# Altium PCB Oled.PcbDoc
Units mm, origin at the board's own origin, x right, y up, seen from the top; angles counter-clockwise.
Board outline 90 x 40 mm, 2 copper layers (Top Layer, Bottom Layer); 54 components, 35 nets, 150 pads, 111 vias.
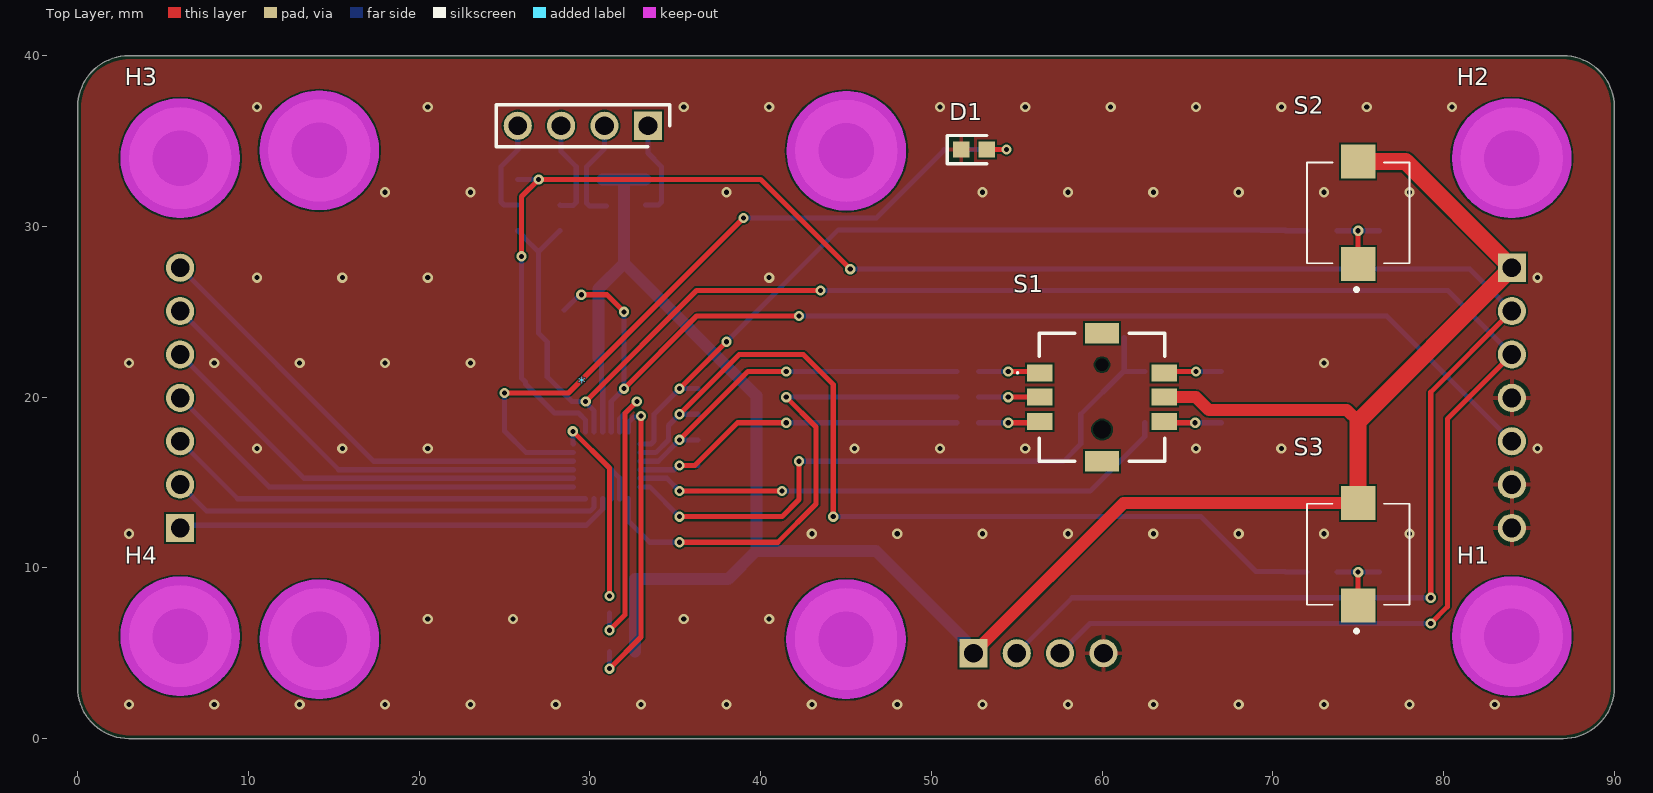
[diagram p0: Top Layer view]
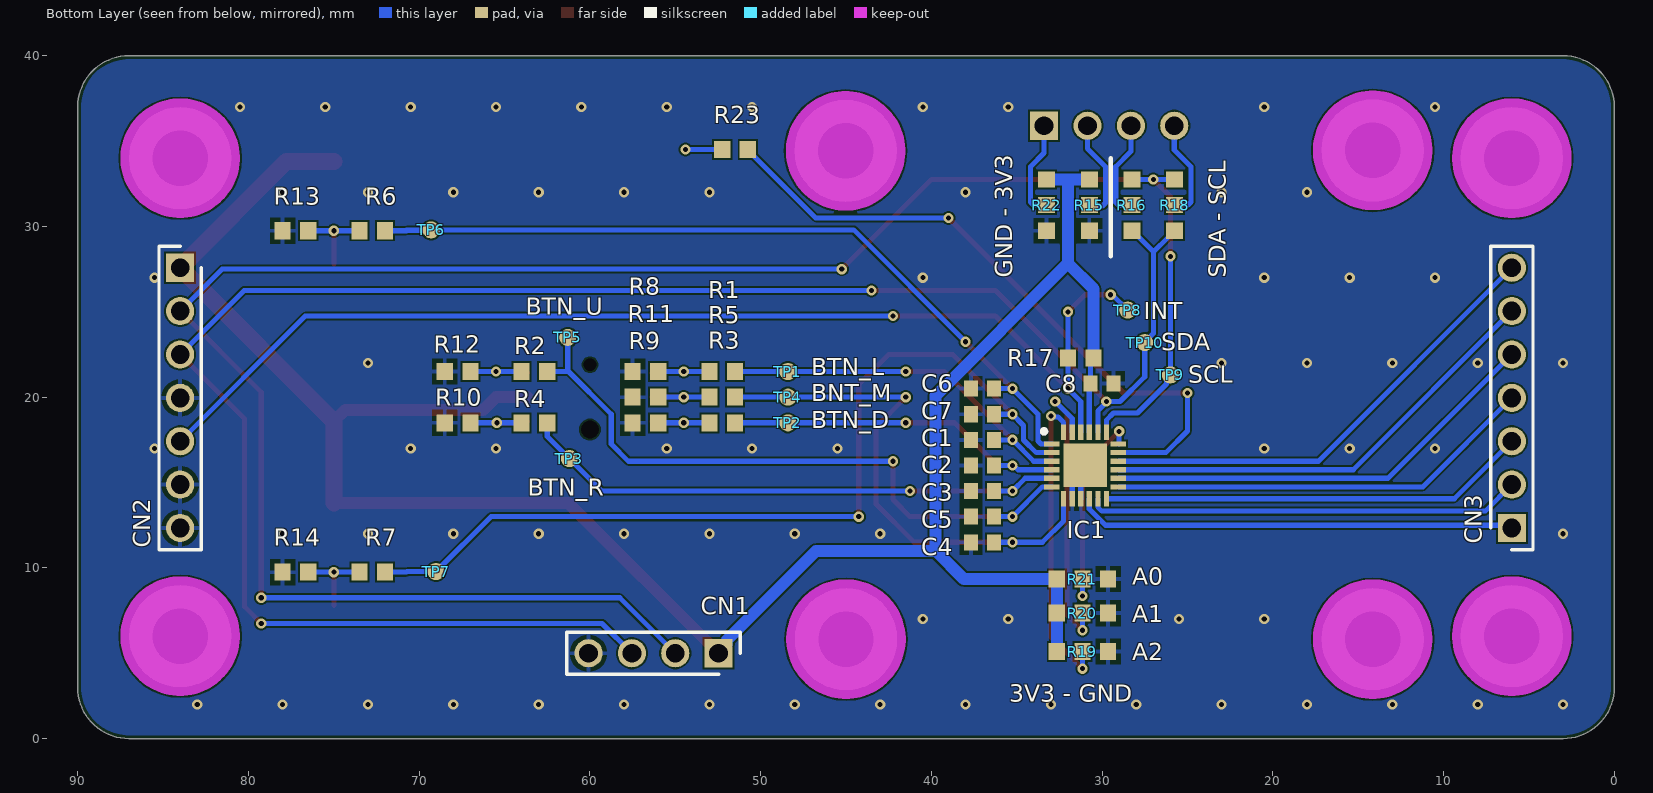
[diagram p1: Bottom Layer view, seen from below]
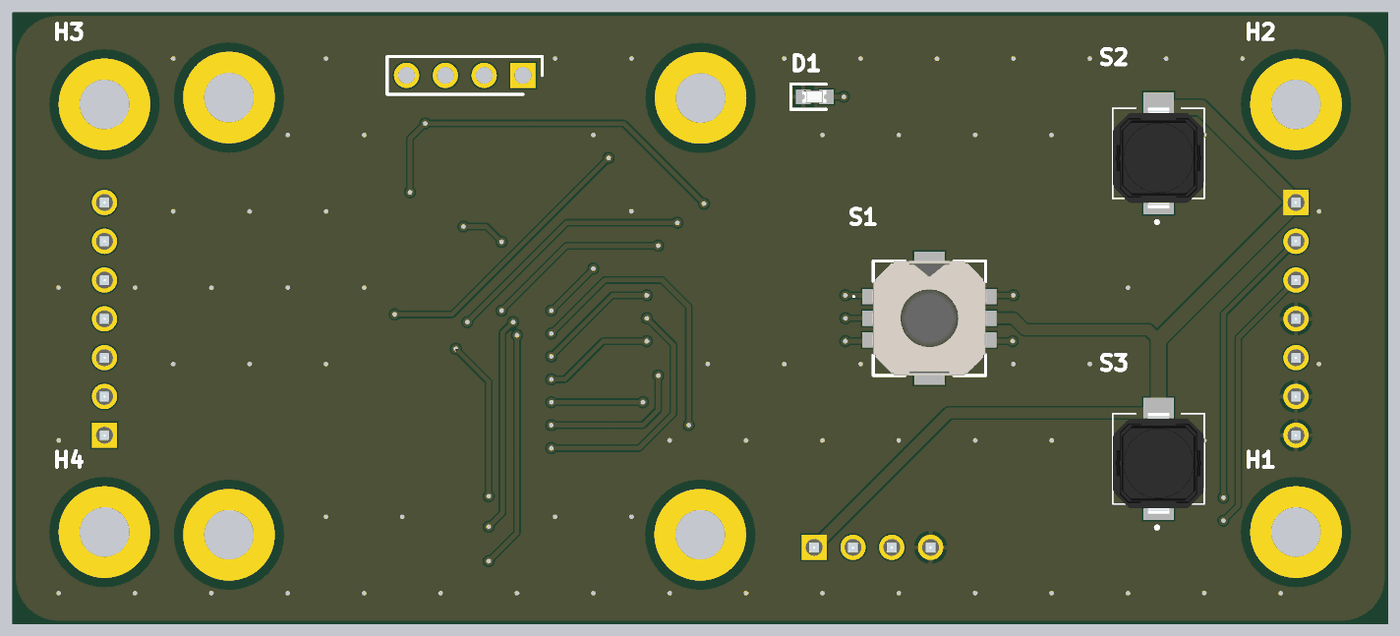
[diagram p2: 3D render of the assembled board from above, using the file's embedded part models]
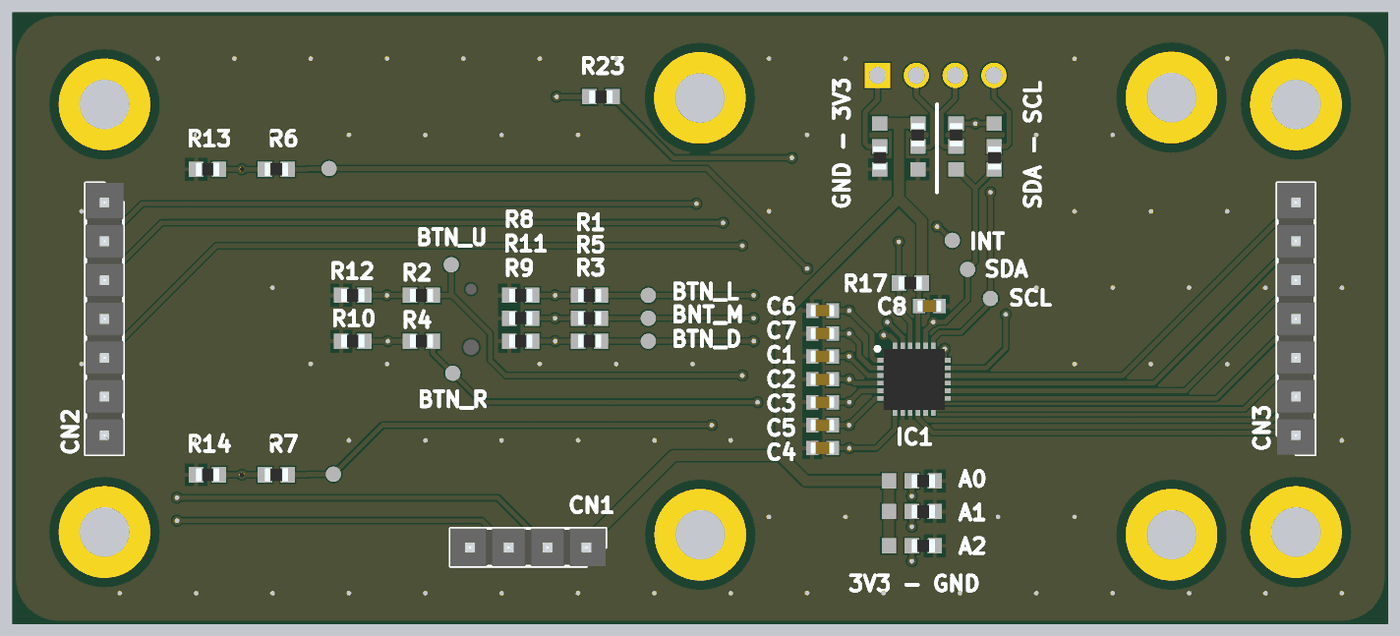
[diagram p3: 3D render of the assembled board from below, using the file's embedded part models]

## Layer stack, top to bottom
Top Solder: solder mask 0.0102, Solder Resist, Dk 3.5
Top Layer: signal copper 0.0356
Dielectric 1: dielectric 0.32, FR-4, Dk 4.8
Bottom Layer: signal copper 0.0356
Bottom Solder: solder mask 0.0102, Solder Resist, Dk 3.5

## Board outline
3,0 cw(c3,3) 0,3 0,37 cw(c3,37) 3,40 87,40 cw(c87,37) 90,37 90,3 cw(c87,3) 87,0

## Design rules (kind name [scope] priority, off if disabled: settings)
AcuteAngle [All] p1: minimum=4.50000000000000E+0001 checktracksonly=FALSE
BoardOutlineClearance [All] p1: gap=0.2 ignorepadtopadclearanceinfootprint=FALSE except(0: Arc-SplitContinuation Track-SplitContinuation SMDPad-SplitContinuation THPad-SplitContinuation Via-SplitContinuation Fill-SplitContinuation Poly-SplitContinuation Region-SplitContinuation Text-SplitContinuation)
Clearance [All] p1: gap=0.1 ignorepadtopadclearanceinfootprint=TRUE except(0: SMDPad-Hole THPad-Hole Via-Hole Text-Hole; 0.127: Arc-Arc Arc-Track Arc-SMDPad Track-Track Track-SMDPad SMDPad-SMDPad SMDPad-Via; 0.15: Arc-Via Track-Via THPad-Via; 0.2: Arc-THPad Arc-Hole Track-THPad Track-Hole SMDPad-THPad; 0.254: Via-Via)
ComponentClearance [All] p1: gap=0 collisioncheckmode=3 verticalgap=0 showdistances=FALSE
DiffPairsRouting 0,1 [All] p1: maxlimit=0.127 minlimit=0.127 mostfreqgap=0.127 toplayer_minwidth=0.123 toplayer_maxwidth=0.123 toplayer_prefwidth=0.123 bottomlayer_minwidth=0.123 bottomlayer_maxwidth=0.123 bottomlayer_prefwidth=0.123 maxuncoupledlength=12.7
HoleSize [All] p1: absolutevalues=TRUE maxlimit=6.3 minlimit=0.3 maxpercent=80.000 minpercent=20.000
HoleToHoleClearance [All] p1: gap=0.5 allowstackedmicrovias=TRUE
MinimumAnnularRing [All] p1: minimumring=0.05
MinimumSolderMaskSliver [All] p1: minsoldermaskwidth=0.1
PlaneConnect [All] p1: planeconnectstyle=Direct reliefexpansion=0.508 reliefentries=4 reliefconductorwidth=0.254 reliefairgap=0.254
PolygonConnect [All] p1: thpad.connectstyle=Relief thpad.reliefconductorwidth=0.254 thpad.reliefentries=4 thpad.polygonreliefangle="90 Angle" thpad.airgapwidth=0.254 smdpad.connectstyle=Relief smdpad.reliefconductorwidth=0.254 smdpad.reliefentries=4 smdpad.polygonreliefangle="90 Angle" smdpad.airgapwidth=0.254 via.connectstyle=Direct via.reliefconductorwidth=0.254 via.reliefentries=4 via.polygonreliefangle="90 Angle" via.airgapwidth=0.254
RoutingVias [All] p1: holewidth=0.15 width=0.25 viastyle="Through Hole" minholewidth=0.1 minwidth=0.2 maxholewidth=6.3 maxwidth=6.4
SilkToSilkClearance [All] p1: silktosilkclearance=0.1
SilkToSolderMaskClearance [IsPad] p1: minsilkscreentomaskgap=0.15 clearancetoexposedcopper=TRUE
SolderMaskExpansion SolderMaskExpansion_Via [IsVia] p1: expansion=0.102 istentingtop=TRUE
SolderMaskExpansion [All] p2: expansion=0 istentingtop=FALSE
SupplyNets "Schematic Supply Nets_1" [InNet('3V3')] p1: voltage=0.000
SupplyNets "Schematic Supply Nets" [InNet('GND')] p2: voltage=0.000
UnRoutedNet [All] p1: checkbadconnections=TRUE
ViasUnderSMD [All] p1: allowed=TRUE
Width [All] p1: maxlimit=6.3 minlimit=0.127 preferedwidth=0.5
21 further rules are at their usual default settings.

## Components (designator, comment, footprint, x,y, rotation, side; value= is the part's Value field where it differs from the comment)
* "SH1106_I2C" SH1106_I2C 22,22 r0 top locked
C1 "1uF" CAP0603 37,17.5 r180 bottom
C2 "1uF" CAP0603 37,16 r180 bottom
C3 "1uF" CAP0603 37,14.5 r180 bottom
C4 "1uF" CAP0603 37,11.5 r180 bottom locked
C5 "1uF" CAP0603 37,13 r180 bottom
C6 "1uF" CAP0603 37,20.5 r180 bottom
C7 "1uF" CAP0603 37,19 r180 bottom
C8 "1uF" CAP0603 30,20.8 r0 bottom
CN1 "Pins 1x3" PIN-1X4 52.46,5 r180 bottom
CN2 "Pins 1x3" PIN-1X7 84,27.58 r90 bottom
CN3 "Pins 1x3" PIN-1X7 6,12.34 r270 bottom
D1 "=Value" LED0603 52.5,34.5 r0 top
H1 "Mounting_Hole_0" MOUNTING_HOLE_M3_0 84,6 r0 top locked
H2 "Mounting_Hole_0" MOUNTING_HOLE_M3_0 84,34 r0 top locked
H3 "Mounting_Hole_0" MOUNTING_HOLE_M3_0 6,34 r0 top locked
H4 "Mounting_Hole_0" MOUNTING_HOLE_M3_0 6,6 r0 top locked
IC1 "TCA9555RTWR" WQFN-24 31,16 r180 bottom
R1 "100R" RES0603 52.25,21.5 r180 bottom
R2 "100R" RES0603 63.25,21.5 r0 bottom
R3 "100R" RES0603 52.25,18.5 r180 bottom
R4 "100R" RES0603 63.25,18.5 r180 bottom
R5 "100R" RES0603 52.25,20 r0 bottom
R6 "100R" RES0603 72.75,29.75 r0 bottom
R7 "100R" RES0603 72.75,9.75 r0 bottom
R8 "10K" RES0603 56.75,21.5 r180 bottom
R9 "10K" RES0603 56.75,18.5 r180 bottom
R10 "10K" RES0603 67.75,18.5 r180 bottom
R11 "10K" RES0603 56.75,20 r180 bottom
R12 "10K" RES0603 67.75,21.5 r180 bottom
R13 "10K" RES0603 77.25,29.75 r180 bottom
R14 "10K" RES0603 77.25,9.75 r180 bottom
R15 "*" "RES0603 _SELECTION" 30.75,32 r270 bottom
R16 "*" "RES0603 _SELECTION" 28.25,32 r270 bottom
R17 "10K" RES0603 31.25,22.3 r180 bottom
R18 "*" "RES0603 _SELECTION" 25.75,30.5 r90 bottom
R19 "*" "RES0603 _SELECTION" 30.4,5.1 r0 bottom
R20 "*" "RES0603 _SELECTION" 30.4,7.35 r0 bottom
R21 "*" "RES0603 _SELECTION" 30.4,9.35 r0 bottom
R22 "*" "RES0603 _SELECTION" 33.25,30.5 r90 bottom
R23 "10K" RES0603 51.5,34.5 r180 bottom
S1 "MU-BUE70R" MUBUE70R 60,20 r0 top locked
S2 "SKPMANE010" SKPMAPE010 75,30 r90 top
S3 "SKPMANE010" SKPMAPE010 75,10 r90 top
TP1 "Test Point" TP_PAD 48.4,21.5 r90 bottom
TP2 "Test Point" TP_PAD 48.4,18.5 r180 bottom
TP3 "Test Point" TP_PAD 61.2,16.4 r180 bottom
TP4 "Test Point" TP_PAD 48.4,20 r180 bottom
TP5 "Test Point" TP_PAD 61.3,23.5 r180 bottom
TP6 "Test Point" TP_PAD 69.3,29.8 r180 bottom
TP7 "Test Point" TP_PAD 69.013,9.788 r180 bottom
TP8 "Test Point" TP_PAD 28.5,25.1 r180 bottom
TP9 "Test Point" TP_PAD 26,21.3 r180 bottom
TP10 "Test Point" TP_PAD 27.5,23.2 r90 bottom

## Footprints (in the part's own frame and the unit in brackets; to place one, negate y for a bottom-side part, rotate by r counter-clockwise, add the part's x,y. Pads: shape width x height; smd on the part's side, far side on the other; paste and mask are expansions set on the pad)
CAP0603 [mm] "1.6 x 0.8 x 0.8 mm"
  rect 0.81x0.94 smd: 1(-0.67,0) 2(0.67,0)
  body extent -0.8,-0.4 0.8,0.4, height 0.9
LED0603 [mm] "LEDC1608X80N"
  rect 0.95x0.95 smd: 1(-0.75,0) 2(0.75,0)
  silkscreen extent -1.58,-0.82 0.75,0.82, body extent -0.83,-0.4 0.77,0.4, height 0.7
MOUNTING_HOLE_M3_0 [mm] "Mounting hole for M3 screws."
  round 6 hole 3.25: H?(0,0)
  Keep-Out Layer circle w3.5: c0,0 r1.75
MUBUE70R [mm]
  rect 1.5x1 smd: A(-3.65,1.425) B(-3.65,0) C(-3.65,-1.425) D(3.65,-1.425) E(3.65,0) F(3.65,1.425)
  round 0.375 hole 0.75 unplated: MH1(0,1.9)
  round 0.525 hole 1.05 unplated: MH2(0,-1.9)
  rect 2x1.2 smd: MP1(0,3.75) MP2(0,-3.75)
  silkscreen extent -5,-3.75 3.67,3.75, body extent -3.75,-3.75 3.75,3.75, height 7.01
PIN-1X4 [mm]
  rect 1.65x1.65 hole 1.1: 1(0,0)
  round 1.65 hole 1.1: 2(-2.54,0) 3(-5.08,0) 4(-7.62,0)
  silkscreen extent -8.89,-1.24 1.27,1.24, body extent -8.89,-1.24 1.27,1.24, height 8.38
PIN-1X7 [mm]
  rect 1.65x1.65 hole 1.1: 1(0,0)
  round 1.65 hole 1.1: 2(-2.54,0) 3(-5.08,0) 4(-7.62,0) 5(-10.16,0) 6(-12.7,0) 7(-15.24,0)
  silkscreen extent -16.51,-1.24 1.27,1.24, body extent -16.51,-1.24 1.27,1.24, height 8.38
RES0603 [mm] "Resistor 0603 (1608 metric)"
  rect 0.95x1 smd: 1(-0.75,0) 2(0.75,0)
  body extent -0.76,-0.43 0.76,0.43, height 0.45
"RES0603 _SELECTION" [mm] "Resistor 0603 (1608 metric)"
  rect 0.95x1 smd: 1(-0.75,0) 2(0.75,0) 3(2.25,0)
  body extent -0.76,-0.43 0.76,0.43, height 0.45
SH1106_I2C [mm]
  rect 1.65x1.65 hole 1.1: 1(11.395,13.9)
  round 1.65 hole 1.1: 2(8.855,13.9) 3(6.315,13.9) 4(3.775,13.9)
  round 6 hole 3.25: H?(-7.85,-16.175) H?(-7.85,12.45) H?(23,-16.175) H?(23.025,12.425)
  Keep-Out Layer circle w3.5: c23,-16.175 r1.75
  Keep-Out Layer circle w3.5: c-7.85,-16.175 r1.75
  Keep-Out Layer circle w3.5: c23.025,12.425 r1.75
  Keep-Out Layer circle w3.5: c-7.85,12.45 r1.75
  silkscreen extent 2.5,12.66 12.66,15.14, body extent -10.42,-18.86 25.58,15.14, height 5.6
SKPMAPE010 [mm]
  rect 2x2 smd: 1(-2.2,0) 2(3.8,0)
  silkscreen extent -3.8,-3 3.75,3, body extent -2.8,-2.97 3.8,2.97, height 5
TP_PAD [mm]
  round 1 smd: 1(0,0)
WQFN-24 [mm]
  rect 0.9x0.3 smd: 1(-1.95,1.25) 2(-1.95,0.75) 3(-1.95,0.25) 4(-1.95,-0.25) 5(-1.95,-0.75) 6(-1.95,-1.25) 13(1.95,-1.25) 14(1.95,-0.75) 15(1.95,-0.25) 16(1.95,0.25) 17(1.95,0.75) 18(1.95,1.25)
  rect 0.3x0.9 smd: 7(-1.25,-1.95) 8(-0.75,-1.95) 9(-0.25,-1.95) 10(0.25,-1.95) 11(0.75,-1.95) 12(1.25,-1.95) 19(1.25,1.95) 20(0.75,1.95) 21(0.25,1.95) 22(-0.25,1.95) 23(-0.75,1.95) 24(-1.25,1.95)
  rect 2.55x2.55 smd: 25(0,0)
  silkscreen extent -2.53,1.88 -2.28,2.12, body extent -2,-2 2,2, height 0.8

## Part data
C1 C2 C3 C4 C5 C6 C7 C8: library part Capacitor, "Capacitor"
CN1: library part Pin-1x4, "2.54mm", Package="SMD 1.27mm", CompType=M50-3530342, Distributor=Mouser, Order Code=855-M50-3530342, Part Class=Connector
CN2 CN3: library part Pin-1x7, "2.54mm", Package="SMD 1.27mm", CompType=M50-3530342, Distributor=Mouser, Order Code=855-M50-3530342, Part Class=Connector
D1: library part LED, "Light Emitting Diode"
H1 H2 H3 H4: "Mounting hole with no connectivity."
IC1: "Integrated Circuit", LCSC Part Number=C42420609, Manufacturer_Name="Texas Instruments", Mouser Part Number=595-TCA9555RTWR, Arrow Part Number=TCA9555RTWR, Arrow Price/Stock=https://www.arrow.com/en/products/tca9555rtwr/texas-instruments?region=nac, Datasheet Link=http://www.ti.com/lit/gpn/tca9555, Height=0.8mm, Manufacturer_Part_Number=TCA9555RTWR, Mouser Price/Stock=https://www.mouser.co.uk/ProductDetail/Texas-Instruments/TCA9555RTWR?qs=O3wcJz4o8IcrHWYYvhjJoA%3D%3D
R1 R2 R3 R4 R5 R6 R7 R8 R9 R10 R11 R12 R13 R14 R17 R23: library part Resistor, "Resistor"
R15 R16 R18 R19 R20 R21 R22: library part Resistor_Selection, "Resistor"
S1: "Switch", LCSC Part Number=C2858287, Manufacturer_Name=Apem, Datasheet Link=https://www.mouser.se/datasheet/2/26/PCB_MU_serie-3371204.pdf, Height=7.2mm, Manufacturer_Part_Number=MU-BUE70R
S2 S3: "Switch (2-Pin Push)", Manufacturer_Name="ALPS Electric", Mouser Part Number=688-SKPMAN, Datasheet Link=https://tech.alpsalpine.com/e/products/detail/SKPMANE010/, Height=5mm, Manufacturer_Part_Number=SKPMANE010, Mouser Price/Stock=https://www.mouser.co.uk/ProductDetail/Alps-Alpine/SKPMANE010?qs=m0BA540hBPdOXU%252BNv5vyYw%3D%3D

## Via types
v1: diameter 0.6, hole 0.3, Top Layer to Bottom Layer, tented both sides, 111 vias

## Nets (pads, with @x,y where several pads share a name; then routed paths per layer and width w, separated by ;. In a path a pad name is that pad's centre, name@x,y a point inside that pad or via, vN(x,y) a via of type N, cw(c..) or ccw(c..) an arc to the next point about the centre after c; other vN are vias at no path point)
3V3: C8.2 CN1.1 CN2.1 IC1.21 R15.1 R17.2 R19.3 R20.3 R21.3 R22.3 S1.E S2.2 S3.2 | length 132.7
  Top Layer w0.7: CN1.1 61.26,13.8 S3.2 ; S1.E 65.5,20 66.25,19.25 74.33,19.25 75,18.58
  Top Layer w1: S3.2 75,18.58 83.675,27.255 CN2.1 77.78,33.8 S2.2
  Bottom Layer w0.3: R17.2 30.67,22.13 C8.2 30.75,20.72 IC1.21
  Bottom Layer w0.7: R17.2 30.5,26.336 32,27.836 ; R15.1 32,32.75 ; R19.3 R20.3 R21.3 38.1,9.35 39.75,11 ; R22.3 32,32.75 ; CN1.1 51.985,5.475 51.985,5.765 46.75,11 39.75,11 ; 32,27.836 39.75,20.086 39.75,11 ; 32,27.836 32,32.75
BUTTON_A: C6.2 IC1.1 R6.1 TP6.1 | length 46.3
  Top Layer w0.3: v1(35.25,20.5) v1(38,23.25)
  Bottom Layer w0.3: IC1.1 33.574,17.25 33.75,17.426 33.75,19 v1(35.25,20.5) C6.2 ; v1(38,23.25) 44.55,29.8 TP6.1 69.325,29.775 70.725,29.775 70.75,29.75 R6.1
BUTTON_B: C7.2 IC1.2 R7.1 TP7.1 | length 52.8
  Top Layer w0.3: v1(35.25,19) 38.75,22.5 42.5,22.5 44.25,20.75 v1(44.25,13)
  Bottom Layer w0.3: IC1.2 33.85,16.75 34.596,17.496 34.596,18.346 v1(35.25,19) C7.2 ; v1(44.25,13) 65.8,13 TP7.1 70.713,9.788 70.75,9.75 R7.1
BUTTON_DOWN: C2.2 IC1.4 R3.2 TP2.1 | length 20.8
  Top Layer w0.3: v1(35.25,16) 36.146,16 38.646,18.5 v1(41.5,18.5)
  Bottom Layer w0.3: IC1.4 34.924,15.75 35.174,16 C2.2 ; v1(41.5,18.5) TP2.1 50.25,18.5 R3.2
BUTTON_LEFT: C1.2 IC1.3 R1.2 TP1.1 | length 21.8
  Top Layer w0.3: v1(35.25,17.5) 39.25,21.5 v1(41.5,21.5)
  Bottom Layer w0.3: IC1.3 34,16.25 v1(35.25,17.5) C1.2 ; v1(41.5,21.5) 50.25,21.5 R1.2
BUTTON_MIDDLE: C4.2 IC1.7 R5.1 TP4.1 | length 31.8
  Top Layer w0.3: v1(35.25,11.5) 41,11.5 43.25,13.75 43.25,18.25 v1(41.5,20)
  Bottom Layer w0.3: IC1.7 32.25,12.75 33.5,11.5 v1(35.25,11.5) C4.2 ; v1(41.5,20) TP4.1 50.25,20 R5.1
BUTTON_RIGHT: C3.2 IC1.5 R4.2 TP3.1 | length 33.1
  Top Layer w0.3: v1(35.25,14.5) v1(41.25,14.5)
  Bottom Layer w0.3: IC1.5 34.5,15.25 v1(35.25,14.5) C3.2 ; v1(41.25,14.5) 59.3,14.5 TP3.1 62.5,17.7 R4.2
BUTTON_UP: C5.2 IC1.6 R2.1 TP5.1 | length 39.2
  Top Layer w0.3: v1(35.25,13) 41.25,13 42.25,14 v1(42.25,16.25)
  Bottom Layer w0.3: IC1.6 33.5,14.75 v1(35.25,13) C5.2 ; v1(42.25,16.25) 57.75,16.25 58.75,17.25 58.75,19 61.25,21.5 ; TP5.1 61.3,21.55 61.25,21.5 ; R2.1 61.25,21.5
GND: C1.1 C2.1 C3.1 C4.1 C5.1 C6.1 C7.1 C8.1 CN1.4 CN2.4 CN2.6 CN2.7 D1.1 IC1.8 IC1.9 IC1.25 R8.1 R9.1 R10.1 R11.1 R12.1 R13.1 R14.1 R15.3 R19.1 R20.1 R21.1 R22.1 | length 4.3
  Bottom Layer w0.3: IC1.9 31.25,15.75 IC1.25 31.75,15.25 IC1.8
  other v1: 3,2 8,2 13,2 18,2 23,2 28,2 33,2 38,2 43,2 48,2 53,2 58,2 63,2 68,2 73,2 78,2 83,2 20.5,7 25.5,7 35.5,7 40.5,7 3,12 43,12 48,12 53,12 58,12 63,12 68,12 73,12 78,12 10.5,17 15.5,17 20.5,17 45.5,17 50.5,17 55.5,17 65.5,17 70.5,17 85.5,17 3,22 8,22 13,22 18,22 23,22 73,22 10.5,27 15.5,27 20.5,27 40.5,27 85.5,27 18,32 23,32 38,32 53,32 58,32 63,32 68,32 73,32 78,32 10.5,37 20.5,37 35.5,37 40.5,37 50.5,37 55.5,37 60.5,37 65.5,37 70.5,37 75.5,37 80.5,37
INT: CN2.5 IC1.22 R17.1 TP8.1 | length 68.4
  Top Layer w0.3: v1(29.5,26) 31,26 v1(32,25) ; v1(32,20.5) 36.25,24.75 v1(42.25,24.75)
  Bottom Layer w0.3: TP8.1 29.343,25.943 29.443,25.943 v1(29.5,26) ; IC1.22 31.25,19.75 v1(32,20.5) R17.1 v1(32,25) ; v1(42.25,24.75) 76.67,24.75 CN2.5
Net*_1: *.1 R22.2 | length 5.8
  Bottom Layer w0.3: R22.2 34.024,31.25 34.2,31.426 34.2,33.5 33.395,34.305 *.1
Net*_2: *.2 R15.2 | length 6.2
  Bottom Layer w0.3: *.2 30.855,34.555 29.8,33.5 29.8,31.376 29.976,31.2 R15.2@30.967,31.2
Net*_3: *.3 R16.2 | length 5.9
  Bottom Layer w0.3: R16.2 28.276,31.224 29.024,31.224 29.2,31.4 29.2,33.5 28.315,34.385 *.3
Net*_4: *.4 R18.2 | length 5.9
  Bottom Layer w0.3: R18.2 24.976,31.25 24.8,31.426 24.8,33.5 25.775,34.475 *.4
NetD1_2: D1.2 R23.1 | length 3.3
  Top Layer w0.3: D1.2 v1(54.4,34.5)
  Bottom Layer w0.3: R23.1 v1(54.4,34.5)
NetIC1_17: IC1.17 R23.2 | length 38.5
  Top Layer w0.3: v1(25,20.25) 28.75,20.25 v1(39,30.5)
  Bottom Layer w0.3: v1(25,20.25) 25,18.022 26.272,16.75 IC1.17 ; v1(39,30.5) 46.775,30.5 50.75,34.475 R23.2
NetIC1_18: IC1.18 R21.2 | length 12.3
  Top Layer w0.3: v1(29,18) 31.15,15.85 v1(31.15,8.35)
  Bottom Layer w0.3: v1(29,18) 29,17.25 IC1.18 ; v1(31.15,8.35) R21.2
NetIC1_23: IC1.23 R20.2 | length 17.3
  Top Layer w0.3: v1(31.15,6.35) 32.056,7.256 32.056,19.056 v1(32.75,19.75)
  Bottom Layer w0.3: v1(31.15,6.35) R20.2 ; IC1.23 31.75,18.75 v1(32.75,19.75)
NetIC1_24: IC1.24 R19.2 | length 18
  Top Layer w0.3: v1(31.15,4.1) 33,5.95 v1(33,18.896)
  Bottom Layer w0.3: v1(31.15,4.1) R19.2 ; IC1.24 32.25,18.517 32.572,18.839 32.943,18.839 v1(33,18.896)
NetR1_1: R1.1 R8.2 S1.A | length 5.4
  Top Layer w0.3: v1(54.5,21.5) 56.275,21.5 S1.A
  Bottom Layer w0.3: R1.1@52.75,21.5 v1(54.5,21.5) R8.2@56.25,21.5
NetR2_2: R2.2 R12.2 S1.F | length 4.9
  Top Layer w0.3: S1.F 63.725,21.5 v1(65.5,21.5)
  Bottom Layer w0.3: R2.2 v1(65.5,21.5) R12.2
NetR3_1: R3.1 R9.2 S1.C | length 5.4
  Top Layer w0.3: v1(54.5,18.5) 56.275,18.5 S1.C
  Bottom Layer w0.3: R3.1@52.75,18.5 v1(54.5,18.5) R9.2@56.25,18.5
NetR4_1: R4.1 R10.2 S1.D | length 4.8
  Top Layer w0.3: S1.D 63.725,18.5 v1(65.45,18.5)
  Bottom Layer w0.3: R4.1 v1(65.45,18.5) 65.5,18.5 R10.2
NetR5_2: R5.2 R11.2 S1.B | length 5.3
  Top Layer w0.3: v1(54.5,20) S1.B
  Bottom Layer w0.3: R5.2@52.75,20 v1(54.5,20) R11.2@56.25,20
NetR6_2: R6.2 R13.2 S2.1 | length 4.4
  Top Layer w0.3: S2.1 v1(75,29.75)
  Bottom Layer w0.3: R6.2@73.75,29.75 v1(75,29.75) R13.2@76.25,29.75
NetR7_2: R7.2 R14.2 S3.1 | length 4.4
  Top Layer w0.3: S3.1 v1(75,9.75)
  Bottom Layer w0.3: R7.2@73.75,9.75 v1(75,9.75) R14.2@76.25,9.75
P10: CN3.1 IC1.10 | length 25.8
  Bottom Layer w0.3: CN3.1 6.16,12.5 29.796,12.5 30.75,13.454 IC1.10
P11: CN3.2 IC1.11 | length 25.5
  Bottom Layer w0.3: CN3.2 7.557,13.323 30.015,13.323 30.25,13.558 IC1.11
P12: CN3.3 IC1.12 | length 25.1
  Bottom Layer w0.3: CN3.3 9.37,14.05 IC1.12
P13: CN3.4 IC1.13 | length 25.2
  Bottom Layer w0.3: CN3.4 11.21,14.75 IC1.13
P14: CN3.5 IC1.14 | length 26.1
  Bottom Layer w0.3: CN3.5 13.25,15.25 IC1.14
P15: CN3.6 IC1.15 | length 26.9
  Bottom Layer w0.3: CN3.6 15.29,15.75 IC1.15
P16: CN3.7 IC1.16 | length 27.7
  Bottom Layer w0.3: CN3.7 17.33,16.25 IC1.16
SCL: CN1.2 CN2.2 IC1.19 R16.1 R18.3 TP9.1 | length 124.7
  Top Layer w0.3: v1(26,28.25) 26,31.75 v1(27,32.75) 40,32.75 v1(45.25,27.5) ; v1(79.25,8.25) 79.25,20.29 CN2.2
  Bottom Layer w0.3: R18.3 v1@26.944,32.75 ; v1(26,28.25) TP9.1 26,21.111 26.222,20.889 26.222,20.778 27.93,19.07 29.33,19.07 29.75,18.65 IC1.19 ; v1(27,32.75) v1@26.944,32.75 ; R16.1 v1@26.944,32.75 ; v1(45.25,27.5) 81.54,27.5 CN2.2 ; CN1.2 58.25,8.25 v1(79.25,8.25)
SDA: CN1.3 CN2.3 IC1.20 R16.3 R18.1 TP10.1 | length 114.7
  Top Layer w0.3: v1(29.75,19.75) 36.25,26.25 v1(43.5,26.25) ; v1(79.25,6.75) 80.223,7.723 80.223,18.723 CN2.3
  Bottom Layer w0.3: R18.1 25.775,29.75 26.1,29.425 26.1,29.4 27,28.5 27,23.726 27.5,23.226 27.5,21.2 28.95,19.75 v1(29.75,19.75) 29.75,19.689 30.25,19.189 IC1.20 ; 27,28.525 28.225,29.75 R16.3 ; v1(43.5,26.25) 80.25,26.25 83.75,22.75 83.75,22.5 CN2.3 ; CN1.3 59.29,6.75 v1(79.25,6.75)
pads on no net: *.H? H1.H? H2.H? H3.H? H4.H? S1.MH1 S1.MH2 S1.MP1 S1.MP2

## Polygon pours and split planes (outlines as drawn)
GND on Bottom Layer "GND_L02_P000" (solid, pour order 0): 3,0 cw(c3,3) 0,3 0,37 cw(c3,37) 3,40 87,40 cw(c87,37) 90,37 90,3 cw(c87,3) 87,0
GND on Top Layer "GND_L01_P001" (solid, pour order 1): 3,0 cw(c3,3) 0,3 0,37 cw(c3,37) 3,40 87,40 cw(c87,37) 90,37 90,3 cw(c87,3) 87,0

## Silkscreen, mask and mechanical layers (free items; w line width, h text height)
Bottom Overlay:
  lines w0.254: 29.5,28.25 29.5,34
  text "SDA - SCL" at 22.754,27.004 h1 r270
  text "GND - 3V3" at 35.254,27.004 h1 r270
  text "BTN_U" at 63.746,24.821 h1
  text "INT" at 27.546,24.554 h1
  text "SDA" at 26.546,22.754 h1
  text "BTN_L" at 47.046,21.271 h1
  text "SCL" at 24.946,20.854 h1
  text "BNT_M" at 47.046,19.771 h1
  text "BTN_D" at 47.046,18.171 h1
  text "BTN_R" at 63.646,14.221 h1
  text "A0" at 28.246,9.004 h1
  text "A1" at 28.246,6.804 h1
  text "A2" at 28.246,4.604 h1
  text "3V3 - GND" at 35.446,2.154 h1
Mechanical 1:
  the board outline again, w0.254